# Altium PCB 21v_boost.PcbDoc
Units mm, origin at the board's own origin, x right, y up, seen from the top; angles counter-clockwise.
Board outline 86.61 x 41.53 mm, 2 copper layers (Top Layer, Bottom Layer); 27 components, 15 nets, 69 pads, 18 vias.
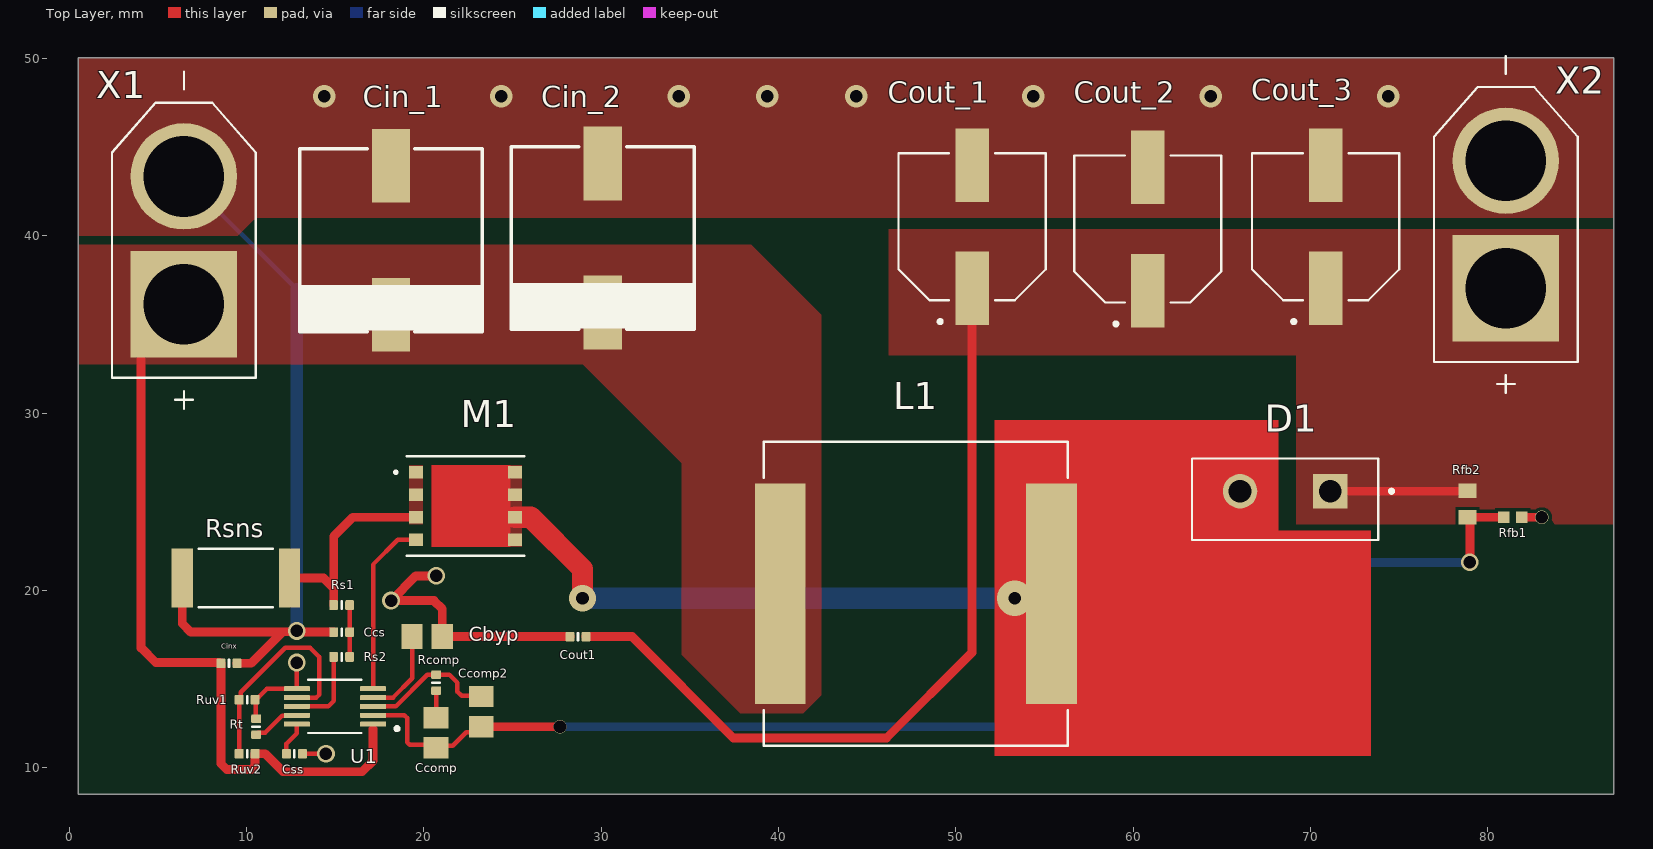
[diagram p0: Top Layer view]
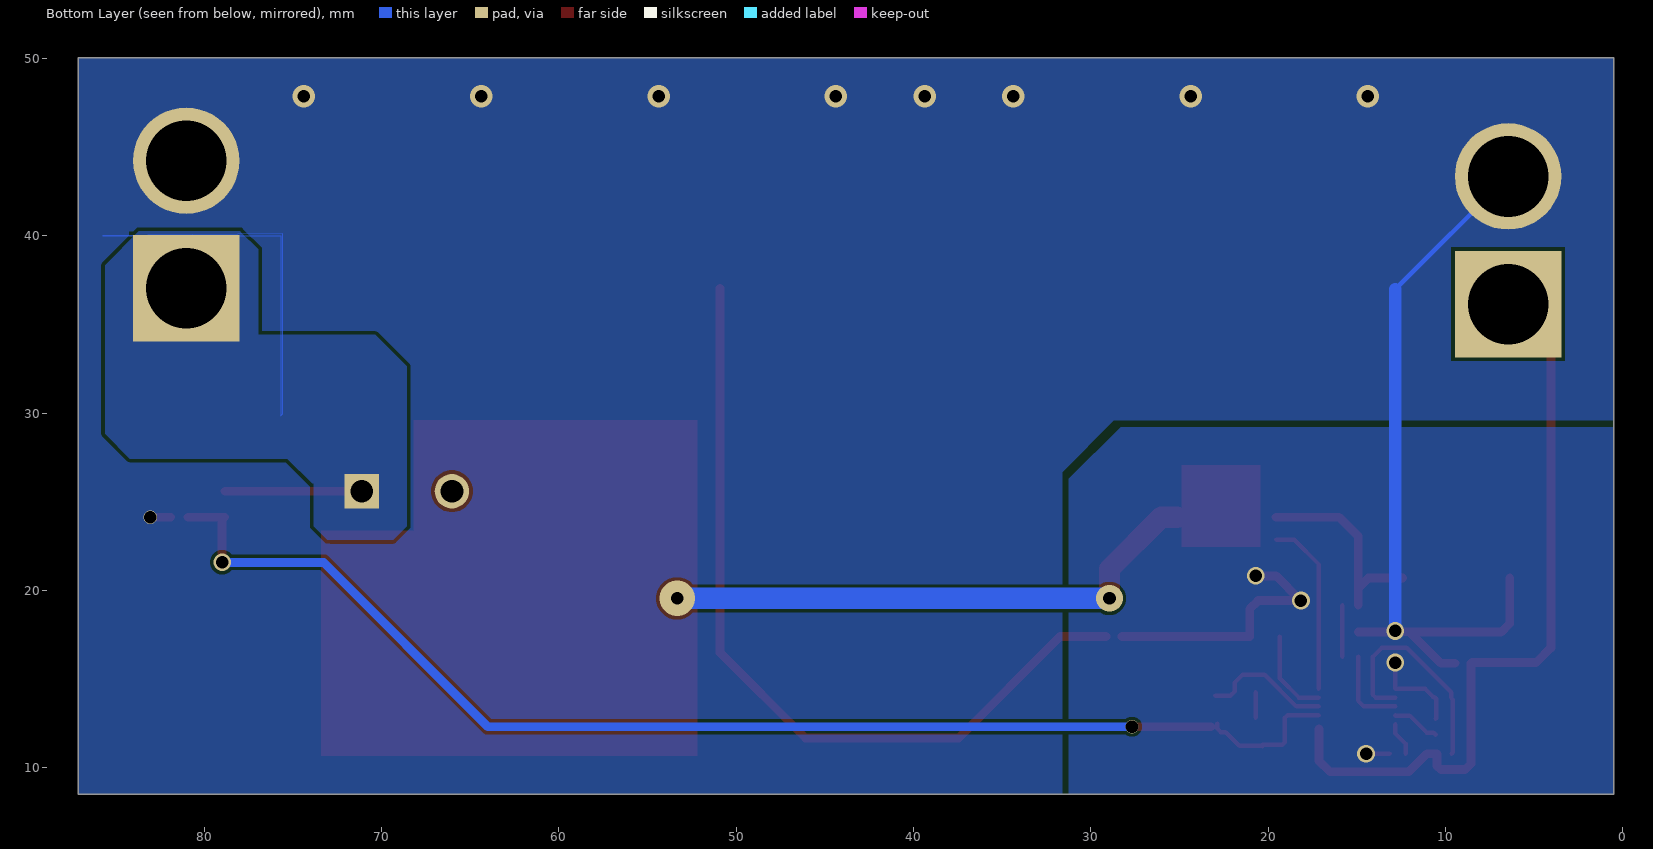
[diagram p1: Bottom Layer view, seen from below]
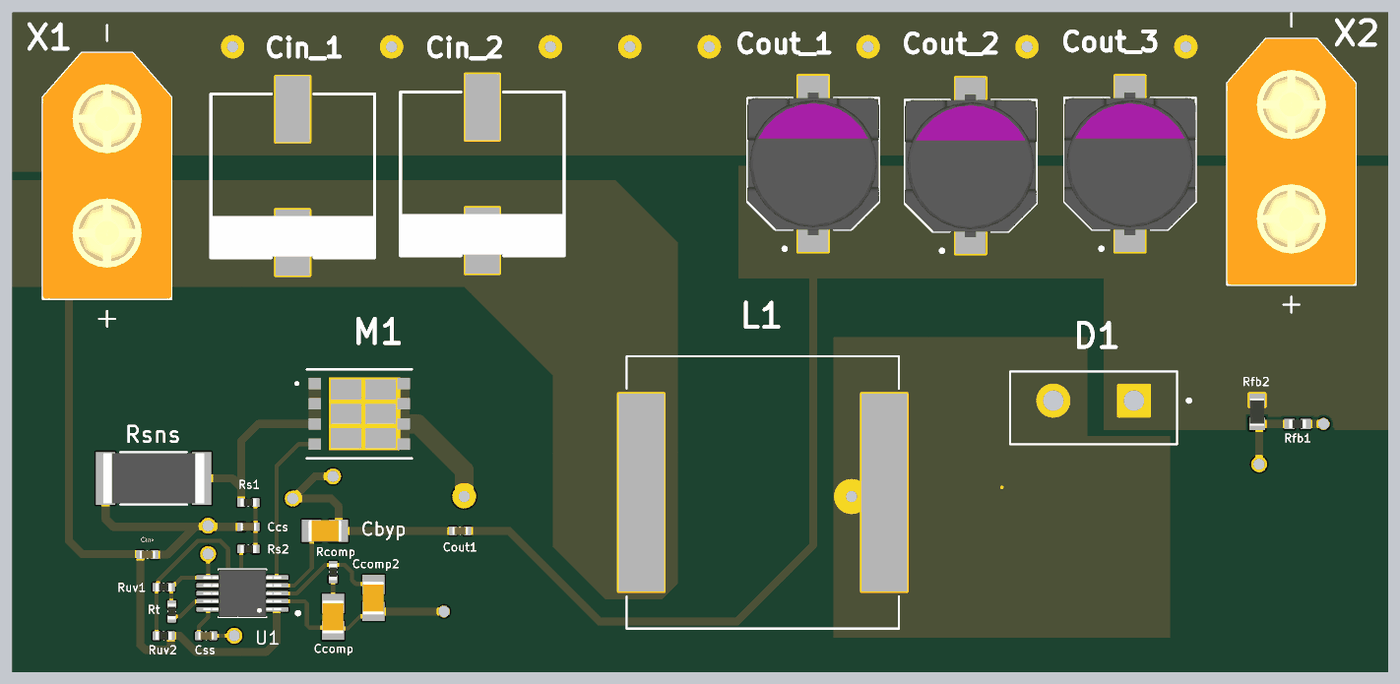
[diagram p2: 3D render of the assembled board from above, using the file's embedded part models]

## Layer stack, top to bottom
Top Solder: solder mask 0.0102, Solder Resist, Dk 3.5
Top Layer: signal copper 0.07
Dielectric 1: dielectric 0.32, FR-4, Dk 4.8
Bottom Layer: signal copper 0.07
Bottom Solder: solder mask 0.0102, Solder Resist, Dk 3.5

## Board outline
87.122,8.509 87.122,50.038 0.508,50.038 0.508,8.509

## Design rules (kind name [scope] priority, off if disabled: settings)
Clearance [All] p1: gap=0.2 ignorepadtopadclearanceinfootprint=FALSE
PolygonConnect [All] p1: connectstyle=Direct reliefconductorwidth=0.254 reliefentries=4 polygonreliefangle="90 Angle" airgapwidth=0.254
RoutingVias [All] p1: holewidth=0.711 width=1.27 viastyle="Through Hole" minholewidth=0.711 minwidth=1.27 maxholewidth=0.711 maxwidth=1.27
SolderMaskExpansion [All] p1: expansion=0.102 istentingtop=FALSE
SupplyNets "Schematic Supply Nets_3" [InNet('VOUT')] p1: voltage=0.000
SupplyNets "Schematic Supply Nets_2" [InNet('VIN')] p2: voltage=0.000
SupplyNets "Schematic Supply Nets" [InNet('GND')] p3: voltage=0.000
Width [All] p1: maxlimit=2 minlimit=0.254 preferedwidth=0.254
30 further rules are at their usual default settings.

## Components (designator, comment, footprint, x,y, rotation, side; value= is the part's Value field where it differs from the comment)
Cbyp "Capacitor 10 uF +/- 10% 16 V 0805" CAPC2013X135X45NL10T25 20.193,17.399 r180 top value=100nF
Ccomp "Capacitor 10 uF +/- 10% 16 V 0805" CAPC2013X135X45NL10T25 20.701,11.977 r270 top value=47nf
Ccomp2 "Capacitor 10 uF +/- 10% 16 V 0805" CAPC2013X135X45NL10T25 23.241,13.169 r270 top value=3.9nf
Ccs "Capacitor 100nF +/-20% 10V 0402" CAPC0402(1005)60_L 15.376,17.653 r180 top value=1nF
Cin_1 "UUD1E471MNL1GS" UD(10X10) 18.161,39.751 r90 top value=470µF
Cin_2 "UUD1E471MNL1GS" UD(10X10) 30.099,39.878 r90 top value=470µF
Cinx "Capacitor 100nF +/-20% 10V 0402" CAPC0402(1005)60_L 9.018,15.899 r180 top value=100nF
Cout1 "Capacitor 470pF +/-20% 50V 0402" CAPC0402(1005)60_L 28.702,17.399 r180 top value=1uF
Cout_1 "35SVPF39M" CAP_35SVPF39M 50.927,40.513 r90 top value=39µF
Cout_2 "35SVPF39M" CAP_35SVPF39M 60.833,40.386 r90 top value=39µF
Cout_3 "35SVPF39M" CAP_35SVPF39M 70.866,40.513 r90 top value=39µF
Css "Capacitor 10µF +/-40% 6.3V 0402" CAPC0402(1005)60_L 12.709,10.795 r180 top value=8.2nF
D1 "510mV" TO508P1050X476X2020-2 68.58,25.146 r180 top
L1 "IHLP6767GZER3R3M01" IND_IHLP6767GZER3R3M01 47.752,19.812 r0 top value=3.3µH
M1 "CSD17303Q5" DQH8 22.352,24.765 r0 top
Rcomp "1KR2J" RESC0402(1005)_L 20.701,14.801 r90 top value=1k
Rfb1 "Resistor 0R +/- 5% 0402 100 mW" RESC1005X40X25ML05T05 81.415,24.13 r180 top value=1.15k
Rfb2 "Resistor 0R +/- 5% 0603 100 mW" RESC1608X55X25ML10T15 78.867,24.88 r90 top value=18k
Rs1 "1D6KR2J" RESC0402(1005)_L 15.376,19.177 r180 top value=100
Rs2 "1D6KR2J" RESC0402(1005)_L 15.376,16.256 r0 top value=3.48K
Rsns "CSRN2512FK15L0" RESC6331X70N 9.407,20.701 r180 top value=15m
Rt "1KR2J" RESC0402(1005)_L 10.55,12.319 r270 top value=42.2k
Ruv1 "1D6KR2J" RESC0402(1005)_L 10.042,13.843 r180 top value=1.74K
Ruv2 "1D6KR2J" RESC0402(1005)_L 10.042,10.795 r0 top value=10K
U1 "LM5022MM/NOPB" SOP50P490X110-10N 14.995,13.462 r180 top
X1 "XT60-M" AMASS_XT60-M 6.477,39.751 r90 top
X2 "XT60-M" AMASS_XT60-M 81.026,40.64 r90 top

## Footprints (in the part's own frame and the unit in brackets; to place one, negate y for a bottom-side part, rotate by r counter-clockwise, add the part's x,y. Pads: shape width x height; smd on the part's side, far side on the other; paste and mask are expansions set on the pad)
AMASS_XT60-M [mm]
  round 6 hole 4.55: N(3.6,0)
  rect 6x6 / inner round 6 / far side rect 6x6 hole 4.55: P(-3.6,0)
  silkscreen extent -9.5,-4.05 9.5,4.05, body extent -7.75,-4.05 7.75,4.05, height 16
CAP_35SVPF39M [mm]
  rect 4.15x1.9 smd: 1(-3.475,0) 2(3.475,0)
  silkscreen extent -5.45,-4.15 4.15,4.15, body extent -4.5,-4.15 4.5,4.15, height 6.9
CAPC0402(1005)60_L [mm] "Chip Capacitor, Body 1.0x0.5mm, Height 0.6mm, IPC High Density"
  rrect25% 0.5x0.55 smd: 1(-0.45,0) 2(0.45,0)
  silkscreen extent 0,-0.2 0,0.2, body extent -0.5,-0.25 0.5,0.25, height 0.6
CAPC2013X135X45NL10T25 [mm] "Chip Capacitor, 2-Leads, Body 2.10x1.35mm, IPC Medium Density"
  rect 1.2x1.4 smd: 1(-0.85,0) 2(0.85,0)
  body extent -1.05,-0.67 1.05,0.67, height 1.35
DQH8 [mil]
  rect 31x28 smd paste-14 mask-15.5: 1(-110,75) 2(-110,25) 3(-110,-25) 4(-110,-75) 5(110,-75) 6(110,-25) 7(110,25) 8(110,75)
  Top Layer region: -75,90 -75,75 -75,-75 -75,-90 100,-90 100,90
  silkscreen extent -157,-110 130,110
IND_IHLP6767GZER3R3M01 [mil]
  rect 113x490 smd: 1(-301,0) 2(301,0)
  silkscreen extent -338,-338 338,338
RESC0402(1005)_L [mm] "Chip Resistor, Body 1.0x0.5mm, IPC High Density"
  rrect25% 0.5x0.55 smd: 1(-0.45,0) 2(0.45,0)
  silkscreen extent 0,-0.2 0,0.2, body extent -0.5,-0.25 0.5,0.25, height 0.3
RESC1005X40X25ML05T05 [mm] "Chip Resistor, 2-Leads, Body 1.05x0.55mm, IPC Low Density"
  rect 0.65x0.65 smd: 1(-0.5,0) 2(0.5,0)
  body extent -0.53,-0.28 0.53,0.28, height 0.4
RESC1608X55X25ML10T15 [mm] "Chip Resistor, 2-Leads, Body 1.70x0.90mm, IPC Low Density"
  rect 0.8x1 smd: 1(-0.75,0) 2(0.75,0)
  body extent -0.85,-0.45 0.85,0.45, height 0.55
RESC6331X70N [mm]
  rect 1.21x3.32 smd: 1(-3.025,0) 2(3.025,0)
  silkscreen extent -2.1,-1.65 2.1,1.65, body extent -3.18,-1.58 3.18,1.58, height 0.7
SOP50P490X110-10N [mm]
  rrect25% 1.47x0.28 smd paste+0 mask+0.102: 1(-2.15,1) 2(-2.15,0.5) 3(-2.15,0) 4(-2.15,-0.5) 5(-2.15,-1) 6(2.15,-1) 7(2.15,-0.5) 8(2.15,0) 9(2.15,0.5) 10(2.15,1)
  silkscreen extent -3.6,-1.5 1.5,1.5, body extent -2.45,-1.5 2.45,1.5, height 1.1
TO508P1050X476X2020-2 [mm]
  rect 1.94x1.94 / inner round 1.94 / far side rect 1.94x1.94 hole 1.29: 1(-2.54,-0.453)
  round 1.94 hole 1.29: 3(2.54,-0.453)
  silkscreen extent -6.1,-2.29 5.25,2.29
UD(10X10) [mm]
  rect 4.15x2.15 smd: 1(-4.2,0) 2(4.2,0)
  silkscreen extent -5.15,-5.15 5.15,5.15

## Part data
Cbyp Ccomp Ccomp2: library part CMP-001-00015-6, "Chip Capacitor, 10 uF, +/- 10%, 16 V, 0805 (2012 Metric)", Capacitor Type=Ceramic, Case/Package=0805, Max Operating Temperature=85°C, Min Operating Temperature=-55°C, Tolerance=10%, Voltage Rating=16V, Mounting Technology=SM, Pins=2, RoHS Compliant=True
Ccs Cinx: library part CMP-001-00061-3, "Chip Capacitor, 100nF +/-20%, 10V, 0402, Thickness 0.6 mm", Case/Package=0402, Max Operating Temperature=85°C, Min Operating Temperature=-55°C, Tolerance=20%, Voltage Rating=10V, Mounting Technology=SMT, Pins=2
Cin_1 Cin_2: library part CMP-001-00083-1, "470ÂµF 25V Aluminum Electrolytic Capacitors Radial, Can - SMD 5000 Hrs @ 105Â°C", Case/Package="Radial Nichicon", Arrow_Electronics-Purchase-URL=https://snapeda.com/shop?store=Arrow+Electronics&id=1197381, Arrow_Europe-Purchase-URL=https://snapeda.com/shop?store=Arrow+Europe&id=1197381, Availability=Good, Component Type=Standard, Design Item ID=UUD1E471MNL1GS, DigiKey-Purchase-URL=https://snapeda.com/shop?store=DigiKey&id=1197381, MF=Nichicon, Mouser-Purchase-URL=https://snapeda.com/shop?store=Mouser&id=1197381, MP=UUD1E471MNL1GS, Pins=2, Price=None, SnapEDA_Link=https://www.snapeda.com/parts/UUD1E471MNL1GS/Nichicon/view-part/1197381/?ref=snap, Source=UUD1E471MNL1GS.SchLib
Cout1: library part CMP-001-00068-4, "Chip Capacitor, 470pF +/-20%, 50V, 0402, Thickness 0.6 mm", Case/Package=0402, Max Operating Temperature=85°C, Min Operating Temperature=-55°C, Tolerance=20%, Voltage Rating=50V, Mounting Technology=SMT, Pins=2
Cout_1 Cout_2 Cout_3: library part CMP-001-00084-1, "Capacitor, Aluminum Organic Polymer, 35VDC,39uF,30mohm,8x7mm,T&R", Case/Package="RADIAL-2 Panasonic", Component Type=Standard, Design Item ID=35SVPF39M, MF=Panasonic, MP=35SVPF39M, Pins=2, SnapEDA_Link=https://www.snapeda.com/parts/35SVPF39M/Panasonic/view-part/?ref=snap, Source=35SVPF39M.SchLib
Css: library part CMP-001-00074-3, "Chip Capacitor, 10µF +/-40%, 6.3V, 0402, Thickness 0.6 mm", Case/Package=0402, Max Operating Temperature=85°C, Min Operating Temperature=-55°C, Tolerance=10%, Voltage Rating=6.3V, Mounting Technology=SMT, Pins=2
D1: library part CMP-004-00031-1, "Rectifier Diode Switching 200V 8A 35ns 2-Pin(2+Tab) TO-220AC Tube", Case/Package=None, Check_prices=https://www.snapeda.com/parts/MUR820G/Onsemi/view-part/?ref=eda, Component Type=Standard, Design Item ID=MUR820G, MF=onsemi, MP=MUR820G, Pins=2, SnapEDA_Link=https://www.snapeda.com/parts/MUR820G/Onsemi/view-part/?ref=snap, Source=MUR820G.SchLib
L1: library part CMP-006-00024-1, Case/Package=None, Availability=Unavailable, Component Type=Standard, Design Item ID=IHLP6767GZER3R3M01, MP=IHLP6767GZER3R3M01, Pins=2, Price=None, Source=IHLP6767GZER3R3M01.SchLib
M1: library part CMP-031-000000-1, "30-V, N channel NexFETâ„¢ power MOSFET, single SON 5 mm x 6 mm, 2.6 mOhm 8-VSON-CLIP -55 to 150", Manufacturer_Name="Texas Instruments", Copyright="Copyright (C) 2025 Ultra Librarian. All rights reserved.", Design Item ID=CSD17303Q5, Manufacturer_Part_Number=CSD17303Q5, RefDes=RefDes, Source=CSD17303Q5.SchLib, Type=Type
Rcomp Rt: library part CMP-009-00075-2, "1K 0.063W 5% 0402 (1005 Metric)  SMD", Case/Package=0402, Power=63mW, Tolerance=5%, Mounting Technology=SMT, Pins=2
Rfb1: library part CMP-009-00005-5, "Chip Resistor, 0 Ohm, 0.1 W, -55 to 155 degC, 0402 (1005 Metric)", Case/Package=0402, Max Operating Temperature=155°C, Min Operating Temperature=-55°C, Power=100mW, Tolerance=5%, Voltage Rating=50V, Mounting Technology=SM, Pins=2, RoHS Compliant=True
Rfb2: library part CMP-009-00006-5, "Chip Resistor, 0 Ohm, 0.1 W, -55 to 155 degC, 0603 (1608 Metric)", Case/Package=0603, Max Operating Temperature=155°C, Min Operating Temperature=-55°C, Power=100mW, Tolerance=5%, Voltage Rating=50V, Mounting Technology=SM, Pins=2, RoHS Compliant=True
Rs1 Rs2 Ruv1 Ruv2: library part CMP-009-00073-2, "1K6 0.063W 5% 0402 (1005 Metric)  SMD", Case/Package=0402, Power=63mW, Tolerance=5%, Mounting Technology=SMT, Pins=2
Rsns: library part CMP-009-00177-1, "15 mOhms Â±1% 2W Chip Resistor 2512 (6432 Metric) Automotive AEC-Q200, Current Sense Thick Film", Case/Package="6331 Stackpole", Check_prices=https://www.snapeda.com/parts/CSRN2512FK15L0/Stackpole+Electronics/view-part/?ref=eda, Component Type=Standard, Design Item ID=CSRN2512FK15L0, MF="Stackpole Electronics Inc", MP=CSRN2512FK15L0, Pins=2, SnapEDA_Link=https://www.snapeda.com/parts/CSRN2512FK15L0/Stackpole+Electronics/view-part/?ref=snap, Source=CSRN2512FK15L0.SchLib
U1: library part CMP-027-000000-1, "6-60V Wide Vin, current mode boost, SEPIC and Flyback controller", Package="VSSOP-10 Texas Instruments", Check_prices=https://www.snapeda.com/parts/LM5022MM/NOPB/Texas+Instruments/view-part/?ref=eda, Component Type=Standard, Design Item ID=LM5022MM/NOPB, MF="Texas Instruments", MP=LM5022MM/NOPB, Pin Count=10, SnapEDA_Link=https://www.snapeda.com/parts/LM5022MM/NOPB/Texas+Instruments/view-part/?ref=snap, Source=LM5022MM_NOPB.SchLib
X1 X2: library part CMP-046-000000-1, "Plug; DC supply; XT60; male; PIN: 2; for cable; soldered; 30A; 500V", Package=Package, Check_prices=https://www.snapeda.com/parts/XT60-M/AMASS/view-part/?ref=eda, Component Type=Standard, Design Item ID=XT60-M, MF=AMASS, MP=XT60-M, Pin Count=2, SnapEDA_Link=https://www.snapeda.com/parts/XT60-M/AMASS/view-part/?ref=snap, Source=XT60-M.SchLib

## Free pads (board coordinates)
  round 0.025 smd: 1(62.801,20.13)

## Via types
v1: diameter 1.27, hole 0.711, Top Layer to Bottom Layer, 8 vias
v2: diameter 1, hole 0.711, Top Layer to Bottom Layer, 6 vias
v3: diameter 0.75, hole 0.711, Top Layer to Bottom Layer, 2 vias
v4: diameter 2, hole 0.711, Top Layer to Bottom Layer, 1 vias
v5: diameter 1.5, hole 0.711, Top Layer to Bottom Layer, 1 vias

## Nets (pads, with @x,y where several pads share a name; then routed paths per layer and width w, separated by ;. In a path a pad name is that pad's centre, name@x,y a point inside that pad or via, vN(x,y) a via of type N, cw(c..) or ccw(c..) an arc to the next point about the centre after c; other vN are vias at no path point)
GND: Cbyp.1 Ccs.2 Cin_1.2 Cin_2.2 Cinx.1 Cout1.2 Cout_1.2 Cout_2.2 Cout_3.2 Css.1 Rfb1.1 Rsns.2 Rt.1 Ruv1.1 U1.6 X1.N X2.N | length 65.5
  Top Layer w0.254: Rt.1 10.521,12.798 10.521,13.897 10.615,13.991 10.698,13.991 11.156,14.449 12.832,14.449 12.836,14.453 v2(12.836,15.937) ; Css.1 v2(14.487,10.795)
  Top Layer w0.5: Rsns.2 6.382,18.138 6.867,17.653 12.024,17.653 ; Cinx.1 10.27,15.899 12.024,17.653 ; v2@12.836,17.653 Ccs.2 ; v2(12.836,17.72) 12.788,17.672 12.043,17.672 12.024,17.653 ; v2(20.701,20.828) 19.558,20.828 v2(18.161,19.431) 20.574,19.431 21.043,18.962 Cbyp.1 Cout1.2 ; Rfb1.1 v3(83.058,24.13)
  Bottom Layer w0.254: X1.N 12.836,36.992
  Bottom Layer w0.7: v2(12.836,17.72) 12.836,36.992
  other v1: 14.384,47.879 24.384,47.879 34.384,47.879 39.384,47.879 44.384,47.879 54.384,47.879 64.384,47.879 74.384,47.879
NetCbyp_2: Cbyp.2 U1.4 | length 5
  Top Layer w0.254: U1.4 18.273,13.962 19.364,15.053 19.364,17.378 Cbyp.2
NetCcomp2_1: Ccomp2.1 Rcomp.2 U1.3 | length 7.4
  Top Layer w0.254: U1.3 18.415,13.462 20.204,15.251 Rcomp.2 21.452,15.251 21.902,14.801 21.902,14.293 22.137,14.058 Ccomp2.1@22.996,14.058
NetCcomp2_2: Ccomp2.2 Ccomp.2 Rfb1.2 Rfb2.1 U1.2 | length 72.1
  Top Layer w0.254: U1.2 18.91,12.962 19.059,12.813 19.059,11.452 19.208,11.303 Ccomp.2@20.329,11.303 ; Ccomp.2@20.333,11.219 20.363,11.249 21.633,11.249 22.396,12.012 22.668,12.012 22.869,12.213 Ccomp2.2@22.869,12.485 ; Rfb2.1 Rfb2.1@78.994,24.003
  Top Layer w0.5: Ccomp2.2 v3(27.686,12.319) ; Rfb2.1 Rfb1.2 ; v2(78.994,21.59) Rfb2.1@78.994,24.003
  Bottom Layer w0.5: v3(27.686,12.319) 64.008,12.319 73.279,21.59 v2(78.994,21.59)
NetCcomp_1: Ccomp.1 Rcomp.1 | length 1.4
  Top Layer w0.254: Ccomp.1 Rcomp.1@20.701,14.263
NetCcs_1: Ccs.1 Rs1.1 Rs2.2 | length 2.9
  Top Layer w0.254: Rs2.2 Ccs.1 Rs1.1
NetCss_2: Css.2 U1.10 | length 1.9
  Top Layer w0.254: Css.2 12.259,11.361 12.836,11.938 12.836,12.453 U1.10
NetD1_3: D1.3 L1.2 M1.5 M1.6 M1.7 M1.8 pad.1 | length 31.1
  Top Layer w1.2: M1.6 26.035,24.13 28.956,21.209 v5(28.956,19.558)
  Bottom Layer w1.2: v5(28.956,19.558) v4(53.34,19.558)
NetM1_1: M1.1 M1.2 M1.3 Rs1.2 Rsns.1 | length 11.7
  Top Layer w0.5: Rsns.1 14.36,20.701 14.926,20.135 ; Rs1.2 14.926,20.135 ; M1.3 16.002,24.13 14.926,23.054 14.926,20.135
NetM1_4: M1.4 U1.5 | length 10
  Top Layer w0.254: U1.5 17.145,21.463 18.542,22.86 M1.4
NetRs2_1: Rs2.1 U1.8 | length 4.7
  Top Layer w0.254: U1.8 14.614,13.462 14.926,13.774 Rs2.1
NetRt_2: Rt.2 U1.9 | length 2.7
  Top Layer w0.254: Rt.2 10.673,11.992 11.058,11.992 12.015,12.949 12.832,12.949 U1.9
NetRuv1_2: Ruv1.2 Ruv2.1 U1.7 | length 12.6
  Top Layer w0.254: Ruv2.1@9.647,10.795 9.592,10.85 Ruv1.2 9.691,13.942 9.691,14.263 12.192,16.764 13.589,16.764 14.097,16.256 14.097,14.111 13.948,13.962 U1.7
VIN: Cin_1.1 Cin_2.1 Cinx.2 L1.1 Ruv2.2 U1.1 X1.P | length 42.9
  Top Layer w0.5: X1.P 4.064,33.738 4.064,16.764 4.888,15.94 8.527,15.94 Cinx.2 8.568,10.236 8.899,9.906 10.274,9.906 10.492,10.124 Ruv2.2 11.058,10.795 12.074,9.779 16.519,9.779 17.145,10.405 17.145,12.192
VOUT: Cout1.1 Cout_1.1 Cout_2.1 Cout_3.1 D1.1 Rfb2.2 X2.P | length 54.4
  Top Layer w0.254: Rfb2.2@78.836,25.599 Rfb2.2
  Top Layer w0.5: Cout1.1 31.75,17.399 37.465,11.684 46.101,11.684 50.927,16.51 Cout_1.1 ; D1.1 Rfb2.2@78.836,25.599

## Polygon pours and split planes (outlines as drawn)
VOUT on Top Layer "VOUT_L01_P003" (solid, pour order 3): 87.122,40.386 46.228,40.386 46.228,33.274 69.215,33.274 69.215,23.727 87.122,23.727
GND on Top Layer "GND_L01_P000" (solid, pour order 0): 0.508,50.038 87.122,50.038 87.122,41.021 10.541,41.021 9.525,40.005 0.508,40.005
VIN on Top Layer "VIN_L01_P001" (solid, pour order 1): 41.402,13.081 42.418,14.097 42.418,35.56 38.481,39.497 0.508,39.497 0.508,32.766 28.956,32.766 34.544,27.178 34.544,16.383 37.846,13.081
NetM1_1 on Top Layer "NETM1_1_L01_P008" (solid, pour order 8): 19.177,27.051 19.177,23.749 19.939,23.749 19.939,27.051
NetD1_3 on Top Layer "NETD1_3_L01_P006" (solid, pour order 6): 20.447,27.051 20.447,22.479 25.527,22.479 25.527,27.051
GND on Bottom Layer "GND_L02_P017" (solid, pour order 17): 0.508,29.21 28.321,29.21 31.242,26.289 31.242,8.509 0.508,8.509
GND on Bottom Layer "GND_L02_P019" (solid, pour order 19): 0.508,50.038 87.122,50.038 87.122,8.509 31.623,8.509 31.623,26.67 28.702,29.591 0.508,29.591
VOUT on Bottom Layer "VOUT_L02_P014" (solid, pour order 14): 73.83,26.035 73.92,26.035 75.317,27.441 84.21,27.441 85.598,28.829 85.598,38.354 83.693,40.259 77.978,40.259 77.978,40.242 76.962,39.24 76.962,34.417 70.358,34.417 68.58,32.639 68.58,23.627 69.346,22.851 72.898,22.851 73.068,22.86 73.83,23.622
no net on Bottom Layer "NONET_L02_P012" (solid, pour order 12): 85.725,40.005 75.692,40.005 75.692,29.845 75.565,29.972 75.565,40.132

## Other copper
Top Layer:
  region net NetD1_3: 68.199,23.368 73.406,23.368 73.406,10.668 52.197,10.668 52.197,29.591 68.199,29.591